# EAGLE board clock_kit (EAGLE 5.06)
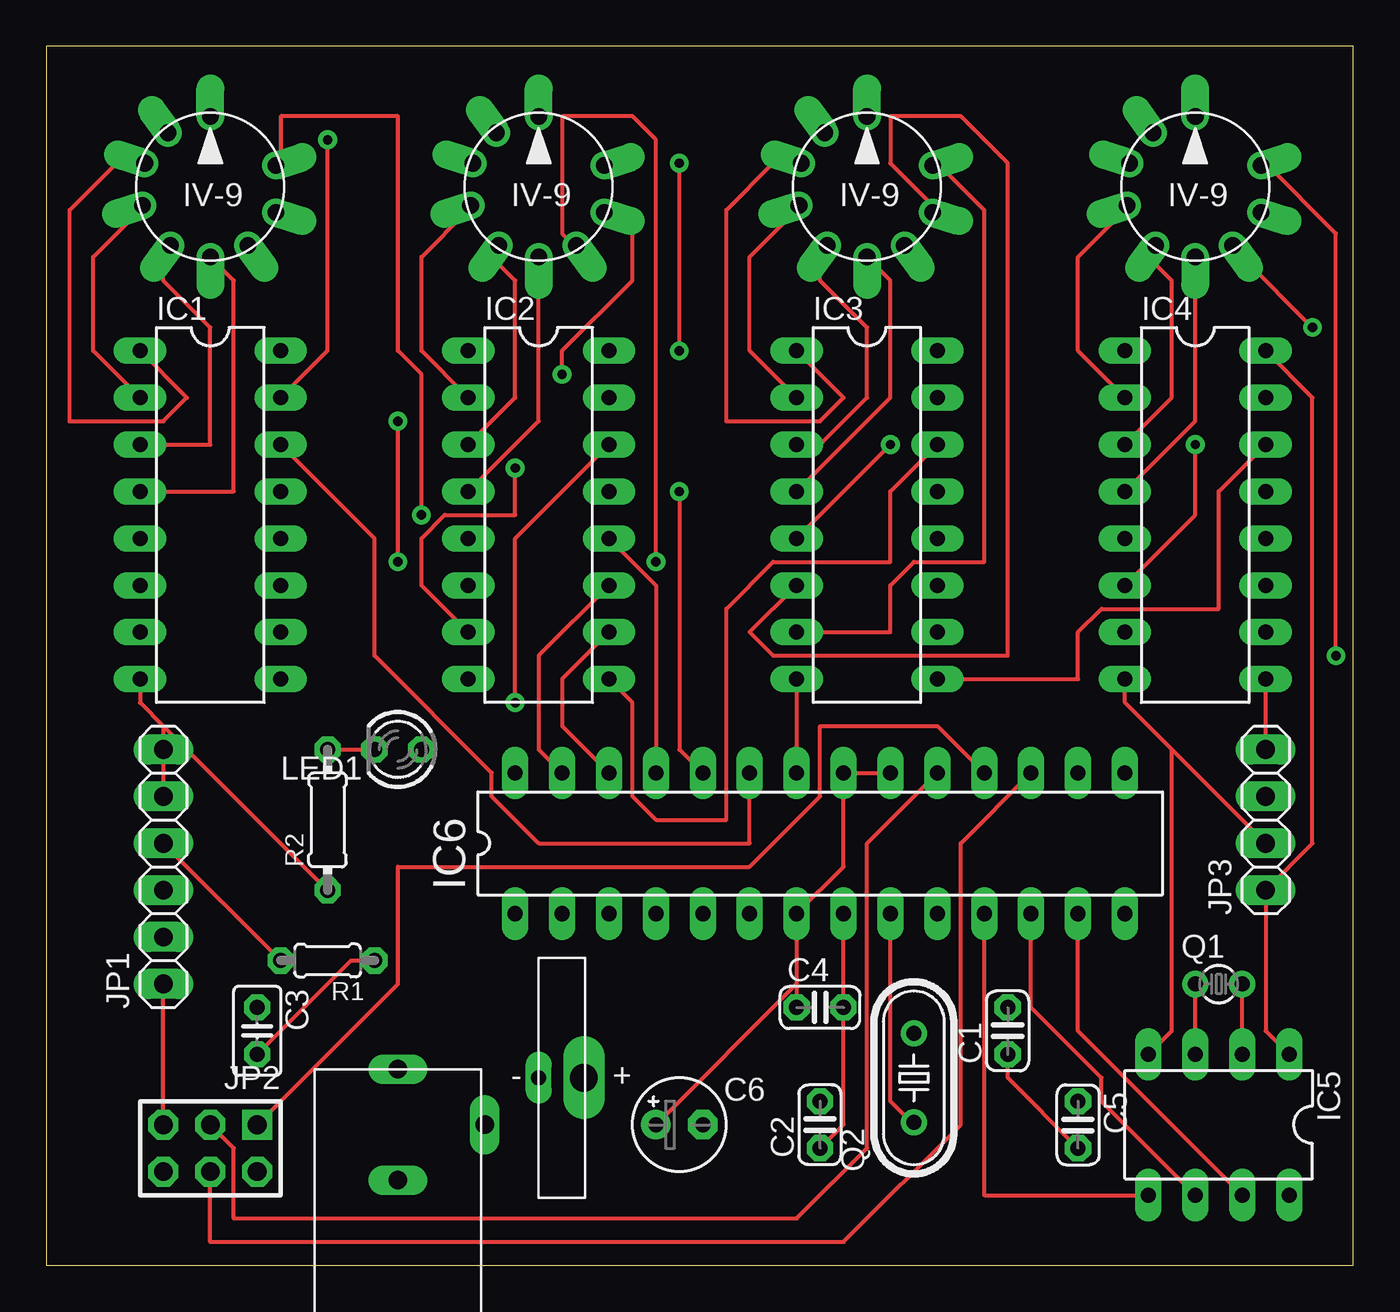
[diagram p0: board, top side]
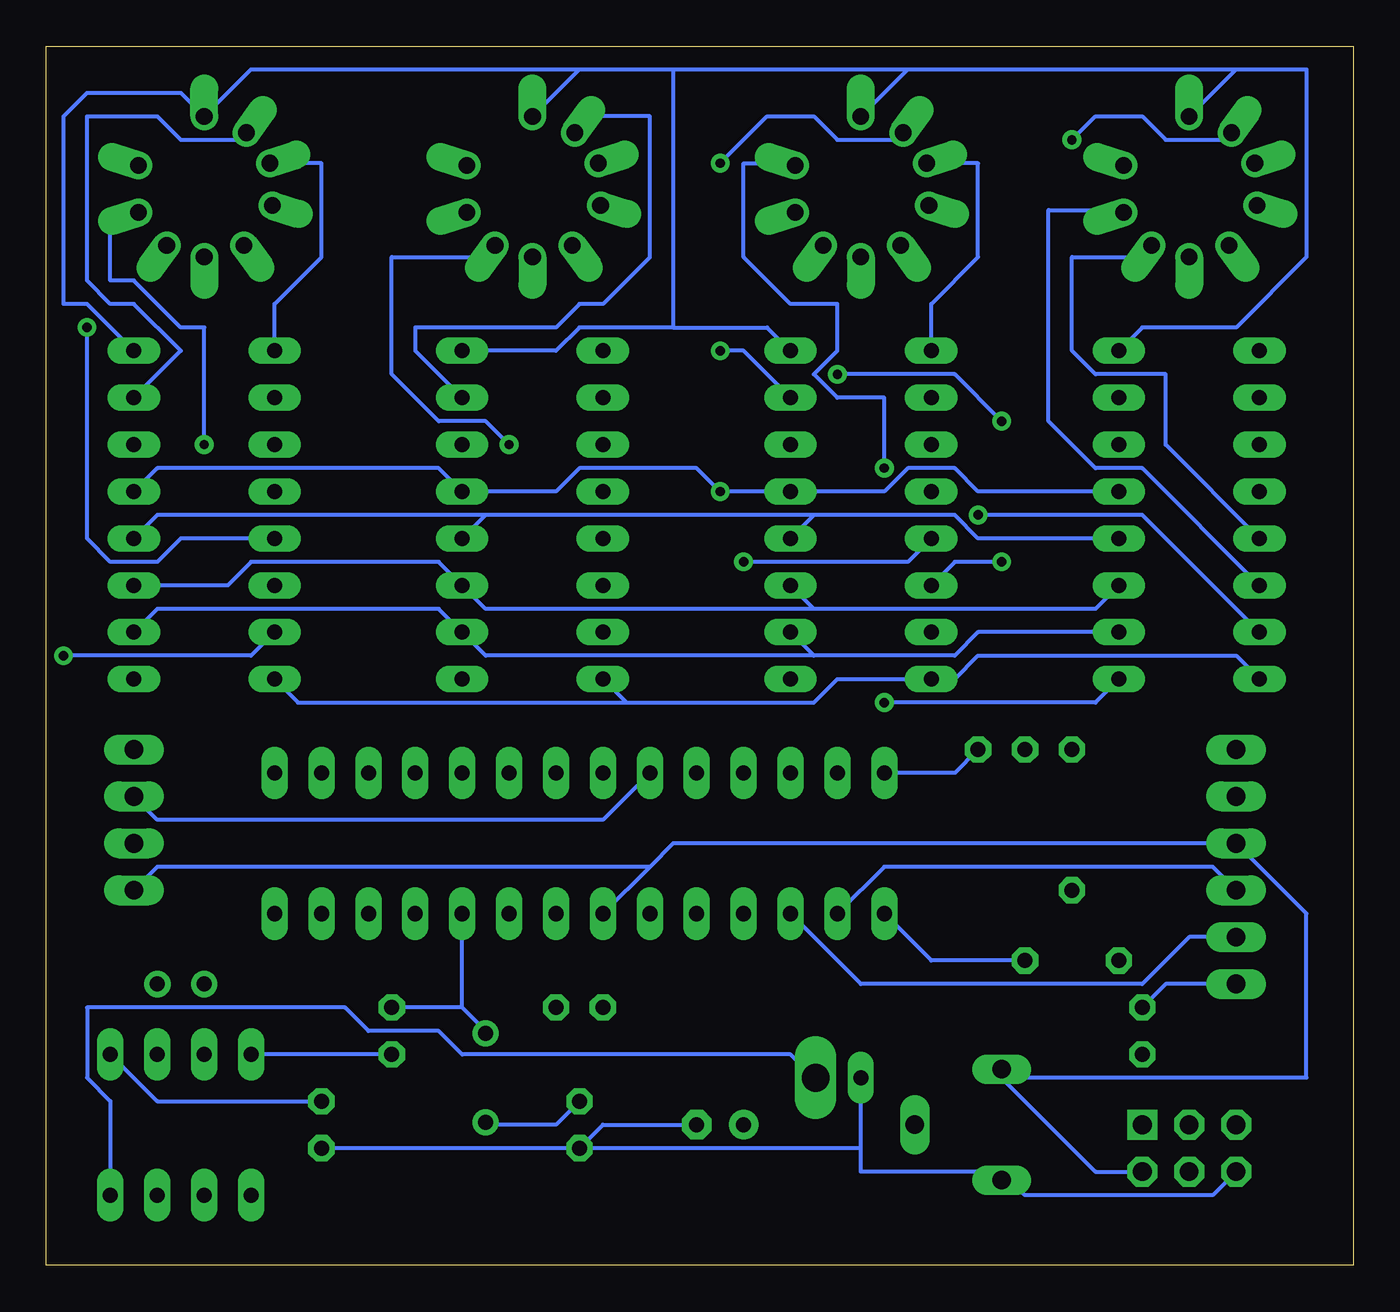
[diagram p1: board, bottom side, seen from below]

Size 70.79 x 66.03 mm. Coordinates in mm from the lower left corner, seen from the top.
Outline: 0,0 70.79,0 70.79,66.03 0,66.03 0,0
Copper layers (1*16): Top 0.035mm / dielectric 1.5mm / Bottom 0.035mm
Design rules "SparkFun": minimum track width 8mil, minimum drill 20mil, track to track 8mil, track to pad 8mil, pad to pad 8mil, via to via 8mil, smd to smd 8mil, copper to edge 10mil, drill to drill 8mil, minimum pad ring 12mil, minimum via ring 10mil, stop-mask expansion 4mil, vias tented up to drill 25mil, thermal gap 10mil

## Footprints (pad centres in the part's own frame; a part is rotated, then mirrored left to right if it is on the bottom)
C025-024X044 = drill 0.813 octagon: 1 -1.27,0; 2 1.27,0
C025-025X050 = drill 0.813 octagon: 1 -1.27,0; 2 1.27,0
E2,5-5 = drill 0.813 pad 1.6 round: + -1.27,0 | drill 0.813 pad 1.6 octagon: - 1.27,0
DIL16 = drill 0.813 long: 1 -8.89,-3.81; 2 -6.35,-3.81; 3 -3.81,-3.81; 4 -1.27,-3.81; 5 1.27,-3.81; 6 3.81,-3.81; 7 6.35,-3.81; 8 8.89,-3.81; 9 8.89,3.81; 10 6.35,3.81; 11 3.81,3.81; 12 1.27,3.81; 13 -1.27,3.81; 14 -3.81,3.81; 15 -6.35,3.81; 16 -8.89,3.81
PDIP8 = drill 0.813 long: 1 -3.81,-3.81; 2 -1.27,-3.81; 3 1.27,-3.81; 4 3.81,-3.81; 5 3.81,3.81; 6 1.27,3.81; 7 -1.27,3.81; 8 -3.81,3.81
DIL28-3 = drill 0.813 long: 1 -16.51,-3.81; 2 -13.97,-3.81; 3 -11.43,-3.81; 4 -8.89,-3.81; 5 -6.35,-3.81; 6 -3.81,-3.81; 7 -1.27,-3.81; 8 1.27,-3.81; 9 3.81,-3.81; 10 6.35,-3.81; 11 8.89,-3.81; 12 11.43,-3.81; 13 13.97,-3.81; 14 16.51,-3.81; 15 16.51,3.81; 16 13.97,3.81; 17 11.43,3.81; 18 8.89,3.81; 19 6.35,3.81; 20 3.81,3.81; 21 1.27,3.81; 22 -1.27,3.81; 23 -3.81,3.81; 24 -6.35,3.81; 25 -8.89,3.81; 26 -11.43,3.81; 27 -13.97,3.81; 28 -16.51,3.81
1X06 = drill 1.016 long: 1 -6.35,0; 2 -3.81,0; 3 -1.27,0; 4 1.27,0; 5 3.81,0; 6 6.35,0
AVR-ISP-6 = drill 1.016 square: 1 -2.54,-1.27 | drill 1.016 octagon: 2 -2.54,1.27; 3 0,-1.27; 4 0,1.27; 5 2.54,-1.27; 6 2.54,1.27
1X04 = drill 1.016 long: 1 -3.81,0; 2 -1.27,0; 3 1.27,0; 4 3.81,0
LED3MM = drill 0.813 octagon: A -1.27,0; K 1.27,0
TC26V = drill 0.813 round: 1 -1.27,0; 2 1.27,0
HC49/S = drill 0.813 round: 1 -2.413,0; 2 2.413,0
0204/5 = drill 0.813 octagon: 1 -2.54,0; 2 2.54,0
0204/7 = drill 0.813 octagon: 1 -3.81,0; 2 3.81,0
IV-9 = drill 0.9 offset: COMMON 0,3.81; SEG0 -2.286,2.921; SEG1 -3.556,1.27; SEG2 -3.683,-1.016; SEG3 -2.159,-3.175; SEG4 0,-3.81; SEG5 2.032,-3.175; SEG6 3.556,-1.397; SEG7 3.556,1.143
ML-1220/V1AN = drill 0.8 long: NEG 0,0 | drill 1.5 long: POS 2.45,0
PJ-102A = drill 1 long: P$1 0,-3; P$2 0,3; P$3 -4.7,0

## Placement (x,y rotation side)
C1  22pF  [C025-024X044]  52.07,12.7 90 top
C2  22pF  [C025-024X044]  41.91,7.62 90 top
C3  0.1uF  [C025-025X050]  11.43,12.7 270 top
C4  0.1uF  [C025-024X044]  41.91,13.97 0 top
C5  0.1uF  [C025-024X044]  55.88,7.62 270 top
C6  100uF  [E2,5-5]  34.29,7.62 0 top
IC1  74LS595N  [DIL16]  8.89,40.64 270 top
IC2  74LS595N  [DIL16]  26.67,40.64 270 top
IC3  74LS595N  [DIL16]  44.45,40.64 270 top
IC4  74LS595N  [DIL16]  62.23,40.64 270 top
IC5  DS1302  [PDIP8]  63.5,7.62 180 top
IC6  MEGA48/88/168-PU  [DIL28-3]  41.91,22.86 0 top
JP1  FTDI  [1X06]  6.35,21.59 90 top
JP2  AVR-ISP-6  [AVR-ISP-6]  8.89,6.35 180 top
JP3  breakout  [1X04]  66.04,24.13 90 top
LED1  3mm  [LED3MM]  19.05,27.94 180 top
Q1  32.7680KHz  [TC26V]  63.5,15.24 0 top
Q2  16MHz  [HC49/S]  46.99,10.16 90 top
R1  10K  [0204/5]  15.24,16.51 180 top
R2  330  [0204/7]  15.24,24.13 90 top
U$1  IV-9  [IV-9]  8.89,58.42 0 top
U$2  IV-9  [IV-9]  26.67,58.42 0 top
U$3  IV-9  [IV-9]  44.45,58.42 0 top
U$4  IV-9  [IV-9]  62.23,58.42 0 top
U$5  ML-1220/V1AN  [ML-1220/V1AN]  26.67,10.16 0 top
U$6  PJ-102A  [PJ-102A]  19.05,7.62 180 top

## Library data of the parts
C1-C6 R1 R2 = rcl
IC1-IC4 = 74xx-us
IC5 = ltc1440_lt1529_ds1302
IC6 JP2 = avr-6
JP1 JP3 = pinhead
LED1 = led
Q1 Q2 = crystal
U$1-U$4 = display_tubes
U$5 = battery_holder
U$6 = power_jacks

## Nets
DEBUG: IC6.28 LED1.A
GND: C1.1 C2.1 C4.2 C5.2 C6.- IC1.8 IC2.8 IC3.8 IC4.8 IC5.4 IC6.8 IC6.22 JP1.5 JP1.6 JP2.6 JP3.2 R2.1 U$5.NEG U$6.P$2
MISO: IC6.18 JP2.1
MOSI: IC6.17 JP2.4
N$1: IC1.15 U$1.SEG0
N$2: IC1.1 U$1.SEG1
N$3: IC1.2 U$1.SEG2
N$4: IC1.3 U$1.SEG3
N$5: IC1.4 U$1.SEG4
N$6: IC1.5 U$1.SEG5
N$7: IC1.6 U$1.SEG6
N$8: IC1.7 U$1.SEG7
N$9: IC2.15 U$2.SEG0
N$10: IC2.1 U$2.SEG1
N$11: IC2.2 U$2.SEG2
N$12: IC2.3 U$2.SEG3
N$13: IC2.4 U$2.SEG4
N$14: IC2.5 U$2.SEG5
N$15: IC2.6 U$2.SEG6
N$16: IC2.7 U$2.SEG7
N$17: IC3.15 U$3.SEG0
N$18: IC3.1 U$3.SEG1
N$19: IC3.2 U$3.SEG2
N$20: IC3.3 U$3.SEG3
N$21: IC3.4 U$3.SEG4
N$22: IC3.5 U$3.SEG5
N$23: IC3.6 U$3.SEG6
N$24: IC3.7 U$3.SEG7
N$25: IC4.15 U$4.SEG0
N$26: IC4.1 U$4.SEG1
N$27: IC4.2 U$4.SEG2
N$28: IC4.3 U$4.SEG3
N$29: IC4.4 U$4.SEG4
N$30: IC4.5 U$4.SEG5
N$31: IC4.6 U$4.SEG6
N$32: IC4.7 U$4.SEG7
N$33: IC1.9 IC2.14
N$34: IC2.9 IC3.14
N$35: IC3.9 IC4.14
N$36: IC5.8 U$5.POS
N$37: IC5.3 Q1.1
N$38: IC5.2 Q1.2
N$39: LED1.K R2.2
N$40: C3.2 IC6.1 R1.1
RST: C3.1 JP1.1 JP2.5
RX: IC6.2 JP1.3
SCK: IC6.19 JP2.3
SR_G: IC1.13 IC2.13 IC3.13 IC4.13 IC6.24
SR_IN: IC1.14 IC6.23 JP3.3
SR_OUT: IC4.9 JP3.4
SR_RCK: IC1.12 IC2.12 IC3.12 IC4.12 IC6.25
SR_SCK: IC1.11 IC2.11 IC3.11 IC4.11 IC6.27
SR_SCL: IC1.10 IC2.10 IC3.10 IC4.10 IC6.26
TIME_IO: IC5.6 IC6.12
TIME_RST: IC5.5 IC6.11
TIME_SCLK: IC5.7 IC6.13
TX: IC6.3 JP1.2
VCC: C4.1 C5.1 C6.+ IC1.16 IC2.16 IC3.16 IC4.16 IC5.1 IC6.7 IC6.20 IC6.21 JP1.4 JP2.2 JP3.1 R1.2 U$1.COMMON U$2.COMMON U$3.COMMON U$4.COMMON U$6.P$1
XTAL1: C2.2 IC6.9 Q2.1
XTAL2: C1.2 IC6.10 Q2.2

## Tracks (layer width: path | path; a pad name or v marks a point on that pad's centre or on a via)
DEBUG
  Bottom 0.203: LED1.A 21.59,26.67 IC6.28
GND
  Top 0.203: C5.2 52.07,10.16 C1.1 | IC6.8 C4.2 43.18,7.62 C2.1 | JP1.5 JP1.6 6.35,29.21 | 6.35,29.21 5.08,30.48 IC1.8 | 6.35,29.21 R2.1 | IC3.8 IC6.22 | 60.96,27.94 58.42,30.48 IC4.8 | 60.96,27.94 JP3.2 | IC5.4 60.96,12.7 60.96,27.94
  Bottom 0.203: 26.67,6.35 26.67,5.08 19.05,5.08 | 26.67,6.35 U$5.NEG | JP2.6 7.62,3.81 17.78,3.81 19.05,5.08 | 19.05,5.08 U$6.P$2 | C1.1 IC5.4 | C2.1 40.64,7.62 C6.- | C2.1 C5.2 | 26.67,6.35 C2.1 | 39.37,30.48 29.21,30.48 27.94,31.75 IC2.8 21.59,31.75 20.32,33.02 6.35,33.02 IC1.8 | 39.37,30.48 IC3.8 | IC4.8 57.15,30.48 39.37,30.48
MISO
  Top 0.203: IC6.18 48.26,29.21 41.91,29.21 41.91,25.4 38.1,21.59 19.05,21.59 19.05,15.24 JP2.1
MOSI
  Top 0.203: IC6.17 49.53,22.86 49.53,7.62 43.18,1.27 8.89,1.27 JP2.4
N$1  (via drill 0.51)
  Top 0.203: IC1.15 15.24,49.53 v15.24,60.96
  Bottom 0.203: v15.24,60.96 13.97,62.23 11.43,62.23 10.16,60.96 6.35,60.96 U$1.SEG0
N$2
  Top 0.203: IC1.1 7.62,46.99 6.35,45.72 1.27,45.72 1.27,57.15 3.81,59.69 U$1.SEG1
N$3
  Top 0.203: IC1.2 2.54,49.53 2.54,54.61 5.08,57.15 U$1.SEG2
N$4
  Top 0.203: IC1.3 8.89,44.45 8.89,50.8 6.35,53.34 6.35,54.61 U$1.SEG3
N$5
  Top 0.203: IC1.4 10.16,41.91 10.16,53.34 U$1.SEG4
N$6
  Bottom 0.203: IC1.5 10.16,44.45 10.16,48.26 13.97,48.26 15.24,49.53 15.24,54.61 11.43,54.61 U$1.SEG5
N$7
  Bottom 0.203: IC1.6 11.43,43.18 13.97,43.18 16.51,45.72 16.51,57.15 12.7,57.15 U$1.SEG6
N$8  (via drill 0.51)
  Top 0.203: v20.32,40.64 20.32,48.26 19.05,49.53 19.05,62.23 12.7,62.23 12.7,59.69 U$1.SEG7
  Bottom 0.203: IC1.7 11.43,40.64 v20.32,40.64
N$9  (via drill 0.51)
  Top 0.203: v34.29,49.53 v34.29,59.69
  Bottom 0.203: IC2.15 33.02,49.53 v34.29,49.53 | v34.29,59.69 31.75,62.23 29.21,62.23 27.94,60.96 24.13,60.96 U$2.SEG0
N$10
  Bottom 0.203: IC2.1 22.86,52.07 20.32,54.61 20.32,59.69 U$2.SEG1
N$11
  Top 0.203: IC2.2 20.32,49.53 20.32,54.61 22.86,57.15 U$2.SEG2
N$12
  Top 0.203: IC2.3 25.4,46.99 25.4,53.34 24.13,54.61 U$2.SEG3
N$13
  Top 0.203: IC2.4 26.67,45.72 U$2.SEG4
N$14  (via drill 0.51)
  Top 0.203: v33.02,38.1 33.02,60.96 31.75,62.23 27.94,62.23 27.94,55.88 29.21,54.61 U$2.SEG5
  Bottom 0.203: IC2.5 24.13,38.1 v33.02,38.1
N$15  (via drill 0.51)
  Top 0.203: v19.05,38.1 v19.05,45.72 | v27.94,48.26 27.94,49.53 31.75,53.34 31.75,55.88 30.48,57.15 U$2.SEG6
  Bottom 0.203: IC2.6 21.59,38.1 v19.05,38.1 | v19.05,45.72 21.59,48.26 v27.94,48.26
N$16  (via drill 0.51)
  Top 0.203: IC2.7 20.32,36.83 20.32,39.37 21.59,40.64 25.4,40.64 v25.4,43.18
  Bottom 0.203: v25.4,43.18 25.4,46.99 27.94,46.99 29.21,48.26 27.94,49.53 27.94,52.07 30.48,52.07 33.02,54.61 33.02,59.69 30.48,59.69 U$2.SEG7
N$17
  Bottom 0.203: IC3.15 50.8,49.53 50.8,50.8 43.18,50.8 41.91,52.07 40.64,52.07 38.1,54.61 38.1,62.23 41.91,62.23 U$3.SEG0
N$18
  Top 0.203: IC3.1 43.18,46.99 41.91,45.72 36.83,45.72 36.83,57.15 39.37,59.69 U$3.SEG1
N$19
  Top 0.203: IC3.2 38.1,49.53 38.1,54.61 40.64,57.15 U$3.SEG2
N$20
  Top 0.203: IC3.3 41.91,44.45 44.45,46.99 44.45,50.8 41.91,53.34 41.91,54.61 U$3.SEG3
N$21
  Top 0.203: IC3.4 45.72,46.99 45.72,53.34 U$3.SEG4
N$22  (via drill 0.51)
  Top 0.203: IC3.5 v45.72,44.45
  Bottom 0.203: v45.72,44.45 46.99,45.72 49.53,45.72 52.07,48.26 52.07,54.61 46.99,54.61 U$3.SEG5
N$23
  Top 0.203: IC3.6 38.1,34.29 39.37,33.02 52.07,33.02 52.07,59.69 49.53,62.23 45.72,62.23 45.72,59.69 48.26,57.15 U$3.SEG6
N$24
  Top 0.203: IC3.7 45.72,34.29 45.72,36.83 46.99,38.1 50.8,38.1 50.8,57.15 48.26,59.69 U$3.SEG7
N$25
  Bottom 0.203: IC4.15 63.5,49.53 66.04,52.07 67.31,52.07 68.58,53.34 68.58,62.23 64.77,62.23 63.5,60.96 59.69,60.96 U$4.SEG0
N$26
  Bottom 0.203: IC4.1 58.42,52.07 55.88,54.61 55.88,59.69 U$4.SEG1
N$27
  Top 0.203: IC4.2 55.88,49.53 55.88,54.61 58.42,57.15 U$4.SEG2
N$28
  Top 0.203: IC4.3 60.96,46.99 60.96,53.34 59.69,54.61 U$4.SEG3
N$29
  Top 0.203: IC4.4 62.23,45.72 U$4.SEG4
N$30  (via drill 0.51)
  Top 0.203: v68.58,50.8 64.77,54.61 U$4.SEG5
  Bottom 0.203: IC4.5 63.5,39.37 64.77,38.1 67.31,38.1 68.58,39.37 v68.58,50.8
N$31  (via drill 0.51)
  Top 0.203: IC4.6 62.23,40.64 v62.23,44.45
  Bottom 0.203: v62.23,44.45 62.23,50.8 63.5,50.8 66.04,53.34 67.31,53.34 67.31,57.15 66.04,57.15 U$4.SEG6
N$32  (via drill 0.51)
  Top 0.203: v69.85,33.02 69.85,55.88 66.04,59.69 U$4.SEG7
  Bottom 0.203: IC4.7 59.69,33.02 v69.85,33.02
N$33  (via drill 0.51)
  Top 0.203: v25.4,30.48 25.4,39.37 IC2.14
  Bottom 0.203: IC1.9 13.97,30.48 v25.4,30.48
N$34
  Top 0.203: IC2.9 31.75,30.48 31.75,25.4 33.02,24.13 36.83,24.13 36.83,35.56 39.37,38.1 45.72,38.1 45.72,41.91 IC3.14
N$35
  Top 0.203: IC3.9 55.88,31.75 55.88,34.29 57.15,35.56 63.5,35.56 63.5,41.91 IC4.14
N$36
  Bottom 0.203: IC5.8 67.31,8.89 68.58,10.16 68.58,13.97 54.61,13.97 53.34,12.7 49.53,12.7 48.26,11.43 30.48,11.43 29.21,10.16 U$5.POS
N$37
  Top 0.203: IC5.3 Q1.1
N$38
  Top 0.203: IC5.2 Q1.2
N$39
  Top 0.203: R2.2 LED1.K
N$40
  Top 0.203: C3.2 16.51,16.51 R1.1
  Bottom 0.203: IC6.1 22.86,16.51 R1.1
RST
  Top 0.203: JP2.5 JP1.1
  Bottom 0.203: C3.1 10.16,15.24 JP1.1
RX
  Bottom 0.203: IC6.2 25.4,21.59 7.62,21.59 JP1.3
SCK
  Top 0.203: IC6.19 44.45,22.86 44.45,6.35 40.64,2.54 10.16,2.54 10.16,6.35 JP2.3
SR_G  (via drill 0.51)
  Top 0.203: IC6.24 34.29,27.94 v34.29,41.91
  Bottom 0.203: IC4.13 64.77,43.18 49.53,43.18 IC3.13 43.18,41.91 41.91,43.18 35.56,43.18 v34.29,41.91 IC2.13 25.4,41.91 24.13,43.18 21.59,43.18 20.32,41.91 IC1.13
SR_IN
  Top 0.203: IC1.14 17.78,39.37 17.78,33.02 24.13,26.67 24.13,25.4 26.67,22.86 38.1,22.86 IC6.23
  Bottom 0.203: JP3.3 64.77,24.13 40.64,24.13 IC6.23
SR_OUT
  Top 0.203: JP3.4 IC4.9
SR_RCK
  Top 0.203: IC6.25 33.02,36.83 IC2.12
  Bottom 0.203: IC1.12 20.32,39.37 21.59,40.64 29.21,40.64 | 29.21,40.64 IC2.12 | 46.99,40.64 IC3.12 | 29.21,40.64 46.99,40.64 | IC4.12 64.77,40.64 46.99,40.64
SR_SCK
  Top 0.203: IC6.27 26.67,27.94 26.67,33.02 IC2.11
  Bottom 0.203: IC1.11 13.97,35.56 29.21,35.56 | 29.21,35.56 IC2.11 | 29.21,35.56 46.99,35.56 IC3.11 49.53,38.1 59.69,38.1 60.96,36.83 IC4.11
SR_SCL
  Top 0.203: IC6.26 27.94,29.21 27.94,31.75 IC2.10
  Bottom 0.203: IC1.10 20.32,34.29 21.59,33.02 29.21,33.02 | 29.21,33.02 IC2.10 | 29.21,33.02 46.99,33.02 IC3.10 49.53,35.56 64.77,35.56 IC4.10
TIME_IO
  Top 0.203: IC5.6 57.15,8.89 57.15,10.16 53.34,13.97 IC6.12
TIME_RST
  Top 0.203: IC5.5 50.8,3.81 IC6.11
TIME_SCLK
  Top 0.203: IC5.7 55.88,12.7 IC6.13
TX
  Bottom 0.203: IC6.3 26.67,15.24 11.43,15.24 8.89,17.78 JP1.2
VCC
  Top 0.203: IC4.16 68.58,46.99 68.58,22.86 JP3.1 66.04,12.7 IC5.1 | IC6.20 IC6.21 43.18,21.59 IC6.7 40.64,15.24 | 40.64,15.24 C4.1 | 40.64,15.24 C6.+ | JP1.4 R1.2
  Bottom 0.203: IC2.16 31.75,50.8 36.83,50.8 | 36.83,50.8 41.91,50.8 43.18,49.53 IC3.16 | IC1.16 11.43,50.8 6.35,50.8 2.54,54.61 2.54,64.77 6.35,64.77 | 6.35,64.77 U$1.COMMON | 24.13,64.77 U$2.COMMON | 24.13,64.77 6.35,64.77 | 41.91,64.77 U$3.COMMON | 36.83,64.77 24.13,64.77 | 41.91,64.77 36.83,64.77 | 41.91,64.77 59.69,64.77 U$4.COMMON 63.5,63.5 68.58,63.5 69.85,62.23 69.85,52.07 68.58,52.07 IC4.16 | 36.83,64.77 36.83,50.8 | C5.1 64.77,8.89 IC5.1 | 19.05,10.16 13.97,5.08 JP2.2 | 19.05,10.16 2.54,10.16 2.54,19.05 JP1.4 36.83,22.86 38.1,21.59 | 19.05,10.16 U$6.P$1 | 38.1,21.59 IC6.7 | JP3.1 64.77,21.59 38.1,21.59
XTAL1
  Top 0.203: IC6.9 45.72,8.89 46.99,7.62 Q2.1
  Bottom 0.203: C2.2 43.18,7.62 46.99,7.62 Q2.1
XTAL2
  Bottom 0.203: 48.26,13.97 46.99,12.7 Q2.2 | 48.26,13.97 C1.2 | 48.26,13.97 IC6.10